# EAGLE board LEDLightSticks_V2--04--USB_to_Molex_PCB_v21 (EAGLE 9.7.0)
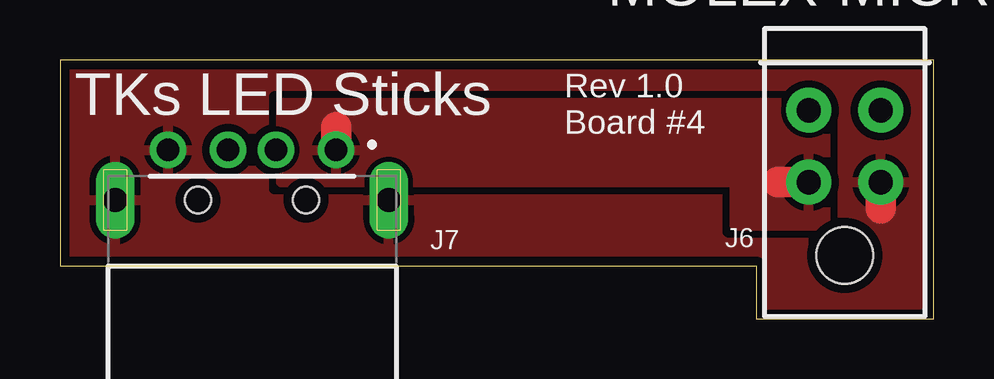
[diagram p0: board, top side]
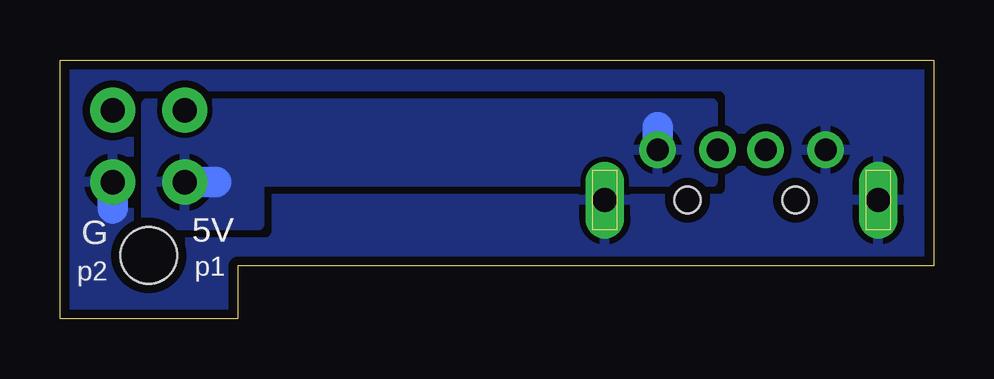
[diagram p1: board, bottom side, seen from below]

Size 36.4 x 10.8 mm. Coordinates in mm from the lower left corner, seen from the top.
Outline: 0,2.2 29,2.2 29,0 36.4,0 36.4,10.8 0,10.8 0,2.2
Copper layers (1*16): Top 0.035mm / dielectric 1.5mm / Bottom 0.035mm
Design rules "TKs_CustomDRU": minimum track width 10mil, minimum drill 20mil, track to track 8mil, track to pad 8mil, pad to pad 8mil, via to via 8mil, smd to smd 8mil, copper to edge 15mil, drill to drill 15mil, minimum pad ring 12mil, minimum via ring 10mil, stop-mask expansion 4mil, vias tented up to drill 20mil, thermal gap 10mil

## Footprints (pad centres in the part's own frame; a part is rotated, then mirrored left to right if it is on the bottom)
MICROFIT_2X2_RA_FEMALE = drill 1.016 pad 1.88: 1 0,0; 2 3,0; 3 0,3; 4 3,3 | hole 2.36: 1.5,-3.05
MOLEX_USB-480370001-TH = drill 0.92: 01 3.5,0; 02 1,0; 03 -1,0; 04 -3.5,0 | drill 1 long: S1 -5.7,-2.1; S2 5.7,-2.1 | hole 1.1: 2.25,-2.1; -2.25,-2.1

## Placement (x,y rotation side)
J6  MOLEX-MICRO-FIT-2X02  [MICROFIT_2X2_RA_FEMALE]  31.2,5.7 0 top
J7  USB-A-PLUGMOLEX  [MOLEX_USB-480370001-TH]  8,7.05 0 top

## Library data of the parts
J6 J7 = LED_Light_Sticks_Library

## Nets
GND: J6.2 J7.04 J7.S1 J7.S2
VIN: J6.1 J7.01

## Tracks (layer width: path | path; a pad name or v marks a point on that pad's centre or on a via)
GND
  Top 1.27: J6.2 34.2,4.6
  Bottom 1.27: J6.2 34.2,4.6
  pour Bottom (isolate 0.305, rank 2): 0.2,0.2 36.2,0.2 36.2,10.6 0.2,10.6
  pour Top (isolate 0.305, rank 2): 0.2,0.2 36.1,0.2 36.1,10.6 0.2,10.6
VIN
  Top 1.27: 29.9,5.7 J6.1 | J7.01 11.5,8
  Bottom 1.27: J6.1 29.9,5.7 | J7.01 11.5,8
  pour Bottom: 28.07,5.62 28.1,5.54 28.1,3.9 32.8,3.9 32.8,9 9.2,9 9.2,5.7 27.94,5.7 28.02,5.67
  pour Top: 9.2,9 9.2,5.7 27.94,5.7 28.02,5.67 28.07,5.62 28.1,5.54 28.1,3.9 31.9,3.9 31.9,9

## Text on the board
tPlace: TKs LED Sticks | Rev 1.0 / Board #4
bPlace: 5V | G | p1 | p2